# Altium PCB pcb.PcbDoc
Units mil, origin at the board's own origin, x right, y up, seen from the top; angles counter-clockwise.
Board outline 1525 x 925 mil, 2 copper layers (Top Layer, Bottom Layer); 21 components, 16 nets, 57 pads, 45 vias.
Unrouted connection lines stored in the file: 10.
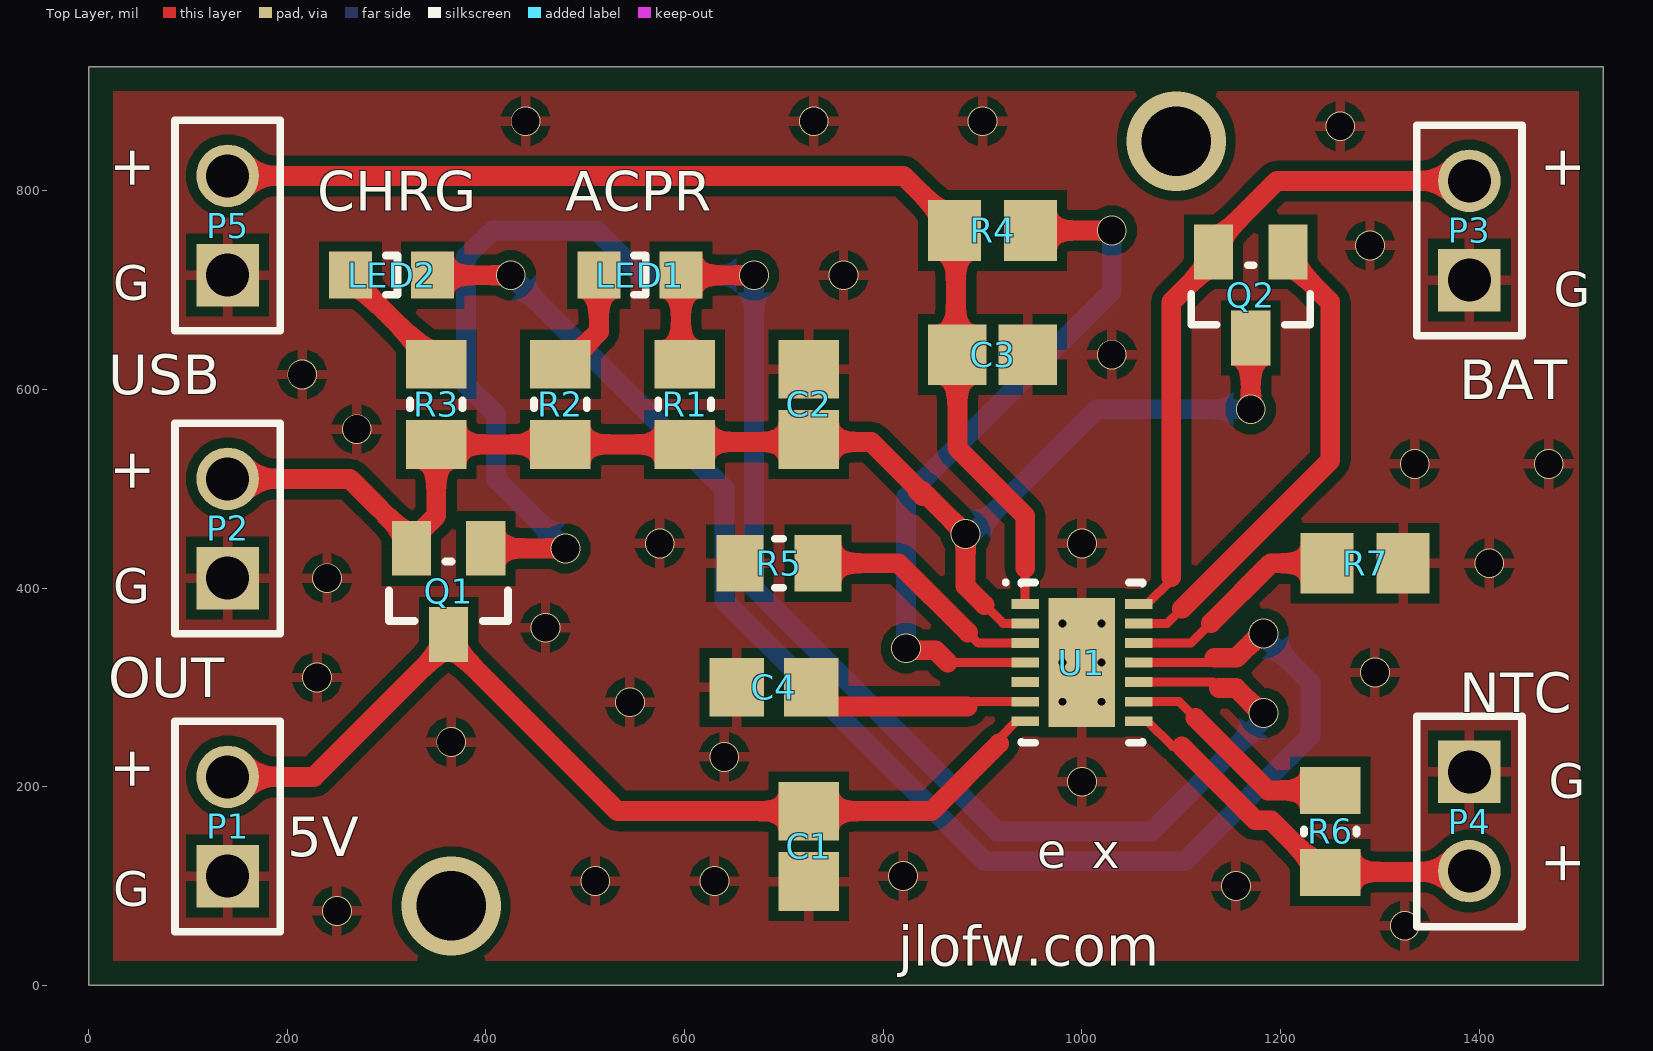
[diagram p0: Top Layer view]
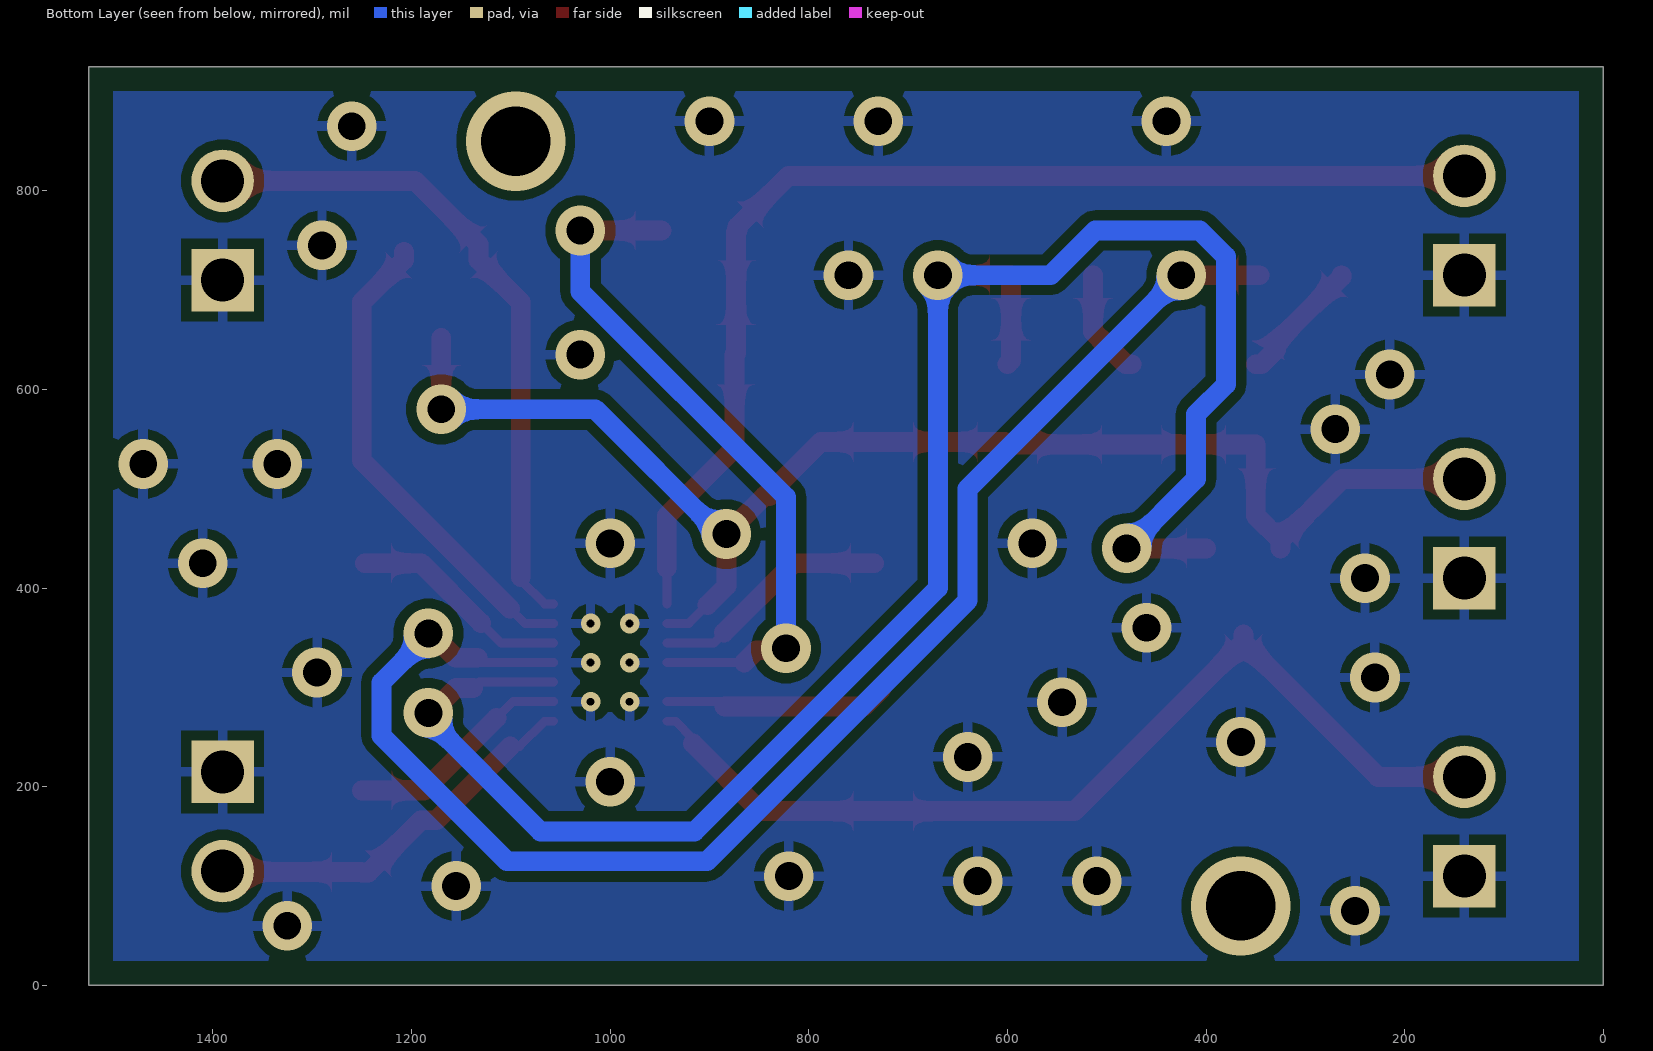
[diagram p1: Bottom Layer view, seen from below]

## Layer stack, top to bottom
Top Solder: solder mask 0.4, Solder Resist, Dk 3.5
Top Layer: signal copper 1.4
Dielectric 1: dielectric 12.6, FR-4, Dk 4.8
Bottom Layer: signal copper 1.4
Bottom Solder: solder mask 0.4, Solder Resist, Dk 3.5

## Board outline
0,0 1525,0 1525,925 0,925

## Design rules (kind name [scope] priority, off if disabled: settings)
Clearance [All] p1: gap=10 ignorepadtopadclearanceinfootprint=TRUE
PolygonConnect [All] p1: connectstyle=Relief reliefconductorwidth=10 reliefentries=4 polygonreliefangle="90 Angle" airgapwidth=10
RoutingVias [All] p1: holewidth=28 width=50 viastyle="Through Hole" minholewidth=28 minwidth=50 maxholewidth=28 maxwidth=50
SolderMaskExpansion [All] p1: expansion=4 istentingtop=FALSE
Width [All] p1: maxlimit=20 minlimit=9 preferedwidth=20
30 further rules are at their usual default settings.

## Components (designator, comment, footprint, x,y, rotation, side; value= is the part's Value field where it differs from the comment)
C1 "4.7uF" CAPC2013X145X50ML20T25 725,140 r90 top
C2 "4.7uF" CAPC2013X145X50ML20T25 725,585 r270 top
C3 "4.7uF" CAPC2013X145X50ML20T25 910,635 r180 top
C4 "0.1uF" CAPC2013X135X45ML10T25 690,300 r0 top
LED1 "Green" 0805_A 555,715 r180 top
LED2 "Red" 0805_A 305,715 r180 top
P1 "Output" 61300211121 140,160 r90 top
P2 "Output" 61300211121 140,460 r90 top
P3 "Battery" 61300211121 1390,760 r90 top
P4 "NTC" 61300211121 1390,165 r270 top
P5 "Output" 61300211121 140,765 r90 top
Q1 "FDN340P" FP-527AG-MFG 362.4,396.69 r270 top
Q2 "FDN340P" FP-527AG-MFG 1170,695 r270 top
R1 "1K" RESC2013X50X30ML20T20 600,585 r270 top
R2 "680" RESC2013X50X30ML20T20 475,585 r270 top
R3 "680" RESC2013X50X30ML20T20 350,585 r270 top
R4 "10K" RESC2013X70X40ML20T20 910,760 r180 top
R5 "2K" RESC2013X60X35ML10T20 695,425 r0 top
R6 "10K" RESC2012X145X30ML20T15 1250,155 r90 top
R7 "100K" RESC2013X70X40ML20T20 1285,425 r180 top
U1 "LTC4085EDE#TRPBF" LT-DE-14_V 1000,325 r0 top

## Footprints (in the part's own frame and the unit in brackets; to place one, negate y for a bottom-side part, rotate by r counter-clockwise, add the part's x,y. Pads: shape width x height; smd on the part's side, far side on the other; paste and mask are expansions set on the pad)
0805_A [mm] "Chip LED, 2-Leads, Body 2.0x1.3mm, IPC Medium Density"
  rect 1.1x1.2 smd: 1(-1.05,0) 2(1.05,0)
  silkscreen extent -0.15,-0.5 0.15,0.5, body extent -1,-0.62 1,0.63, height 0.68
61300211121 [mm] "Pin Header, pitch 2.54 mm, THT, Vertical, single row, 2p"
  rect 1.6x1.6 hole 1.1: 1(-1.27,0)
  round 1.6 hole 1.1: 2(1.27,0)
  silkscreen extent -2.69,-1.35 2.69,1.35, body extent -2.54,-1.27 2.54,1.27, height 8.57
CAPC2013X135X45ML10T25 [mm] "Chip Capacitor, 2-Leads, Body 2.10x1.35mm, IPC Low Density"
  rect 1.4x1.5 smd: 1(-0.95,0) 2(0.95,0)
  body extent -1.05,-0.67 1.05,0.67, height 1.35
CAPC2013X145X50ML20T25 [mm] "Chip Capacitor, 2-Leads, Body 2.00x1.25mm, IPC Low Density"
  rect 1.5x1.55 smd: 1(-0.9,0) 2(0.9,0)
  body extent -1.1,-0.72 1.1,0.72, height 1.45
FP-527AG-MFG [mm]
  rect 1.4x1 smd paste+0 mask+0: 1(-1.1,0.95) 2(-1.1,-0.95) 3(1.1,0)
  silkscreen extent -0.76,-1.52 0.76,1.52, body extent -1.9,-1.62 1.9,1.62, height 0.25
LT-DE-14_V [mm] "SON, 14-Leads, Body 4x3mm, Pitch 0.5mm, Thermal Pad 3.3x1.7mm"
  rect 0.7x0.25 smd: 1(-1.45,1.5) 2(-1.45,1) 3(-1.45,0.5) 4(-1.45,0) 5(-1.45,-0.5) 6(-1.45,-1) 7(-1.45,-1.5) 8(1.45,-1.5) 9(1.45,-1) 10(1.45,-0.5) 11(1.45,0) 12(1.45,0.5) 13(1.45,1) 14(1.45,1.5)
  rect 1.7x3.3 smd: 15(0,0)
  silkscreen extent -2,-2.05 1.55,2.1, body extent -1.5,-2 1.5,2, height 0.8
RESC2012X145X30ML20T15 [mm] "Chip Resistor, 2-Leads, Body 2.01x1.25mm, IPC Low Density"
  rect 1.2x1.55 smd: 1(-1.05,0) 2(1.05,0)
  silkscreen extent -0.05,-0.67 0.05,0.67, body extent -1.11,-0.72 1.1,0.72, height 1.45
RESC2013X50X30ML20T20 [mm] "Chip Resistor, 2-Leads, Body 2.00x1.25mm, IPC Low Density"
  rect 1.25x1.55 smd: 1(-1.025,0) 2(1.025,0)
  silkscreen extent -0.1,-0.67 0.1,0.67, body extent -1.1,-0.72 1.1,0.72, height 0.5
RESC2013X60X35ML10T20 [mm] "Chip Resistor, 2-Leads, Body 2.00x1.25mm, IPC Low Density"
  rect 1.2x1.45 smd: 1(-1,0) 2(1,0)
  silkscreen extent -0.1,-0.63 0.1,0.63, body extent -1.05,-0.67 1.05,0.67, height 0.6
RESC2013X70X40ML20T20 [mm] "Chip Resistor, 2-Leads, Body 2.00x1.25mm, IPC Low Density"
  rect 1.35x1.55 smd: 1(-0.975,0) 2(0.975,0)
  body extent -1.1,-0.72 1.1,0.72, height 0.7

## Part data
C1 C2 C3: library part CMP-2007-01010-1, Manufacturer=Kemet, Part Number=C0805C475K3PACTU
C4: library part CMP-2100-03644-1, "Chip Capacitor, 0.1 uF, +/- 10%, 50 V, -55 to 125 degC, 0805 (2012 Metric), RoHS, Tape and Reel", Capacitance=100nF, Case Code (Imperial)=0805, Case Code (Metric)=2012, Dielectric=X7R, Dielectric Material=Ceramic, Insulation Resistance=10GR, Manufacturer=Murata, Max Operating Temperature=125degC, Min Operating Temperature=-55degC, Package Description="2-Pin Surface Mount Device, Body 2 x 1.25 mm", Package Quantity=1, Tolerance=10%, Voltage=50V, Case/Package=0805, Datasheet URL=http://psearch.en.murata.com/capacitor/product/GRM21BR71H104KA01%23.pdf, Datasheet Version=42675.0, Depth=1.25mm, Height=1.25mm, Lead Free=LeadFree, Length=2mm, Manufacturer URL=http://www.murata.com/, Material=Ceramic, Mount=SurfaceMount, Number of Pins=2, Package Reference=0805, Packaging=TapeandReel, Radiation Hardening=No, REACH SVHC=Unknown, RoHSCompliant=true, Termination=SMD/SMT, Thickness=0.053inch, Voltage Rating=50V, Voltage Rating (DC)=50V, Width=0.049inch
LED1: library part CMP-1426-00007-1, "SMD mono-color Chip LED, WL-SMCW, Green", Manufacturer="Wuerth Elektronik", PartNumber=150080GS75000, Color=Green, ComponentLink1Description="Manufacturer URL", ComponentLink1URL=http://www.we-online.com, ComponentLink2Description=Datasheet, ComponentLink2URL=http://katalog.we-online.com/led/datasheet/150080GS75000.pdf, PackageReference=0805_A
LED2: library part CMP-1426-00011-1, "SMD mono-color Chip LED, WL-SMCW, Red", Manufacturer="Wuerth Elektronik", PartNumber=150080RS75000, Color=Red, ComponentLink1Description="Manufacturer URL", ComponentLink1URL=http://www.we-online.com, ComponentLink2Description=Datasheet, ComponentLink2URL=http://katalog.we-online.com/led/datasheet/150080RS75000.pdf, PackageReference=0805_A
P1 P2 P3 P4 P5: library part CMP-1712-00002-4, "THT Vertical Pin Header WR-PHD, Pitch 2.54 mm, Single Row, 2 pins", Contact Resistance=20mOhm, Manufacturer="Wurth Elektronik", Operating Temperature=-40to105degC, Package Reference=61300211121, Rated Current=3A, Withstanding Voltage=500VAC, Working Voltage=250VAC, Datasheet URL=https://katalog.we-online.de/em/datasheet/6130xx11121.pdf, Gender=Male, Manufacturer URL=http://www.we-online.de, Mounting Technology=THT, Orientation=Vertical, Packaging=Bag, Part Number=61300211121, Pin Number=2, Pitch=2.54mm, Publisher=WurthElektronik, Row Number=Single
Q1 Q2: library part CMP-2100-03638-2, "MOSFET P-CH 20V 2A SSOT3", Case/Package=SOT-23, Continuous Drain Current (ID)=2A, Current Rating=-2A, Drain to Source Breakdown Voltage=-20V, Drain to Source Resistance=60mR, Drain to Source Voltage (Vdss)=20V, Gate to Source Voltage (Vgs)=8V, Input Capacitance=779pF, Max Operating Temperature=150°C, Max Power Dissipation=500mW, Min Operating Temperature=-55°C, On-State Resistance=70MR, Package Quantity=1, Threshold Voltage=-800mV, Contact Plating=Tin, Dual Supply Voltage=-20V, Element Configuration=Single, Fall Time=11ns, Height=0.94mm, Lead Free="Lead Free", Length=2.92mm, Mount="Surface Mount", Nominal Vgs=-800mV, Number of Elements=1, Number of Pins=3, Packaging="Tape and Reel", Power Dissipation=500mW, Radiation Hardening=No, Rds On Max=70mR, REACH SVHC="No SVHC", Rise Time=9ns, Termination=SMD/SMT, Turn-Off Delay Time=27ns, Turn-On Delay Time=10ns, Voltage Rating (DC)=-20V, Weight=0.03g, Width=3.05mm
R1: library part CMP-1013-00510-2, Manufacturer="Vishay Dale", Part Number=CRCW08051K00FKEA
R2 R3: library part CMP-2001-04066-1, Manufacturer="Vishay Dale", Part Number=CRCW0805680RFKEA
R4: library part CMP-2001-00337-1, Manufacturer=Panasonic, Part Number=ERJ-6GEYJ103V
R5: library part CMP-2001-01361-1, Manufacturer=Yageo, Part Number=RC0805JR-072KL
R6: library part CMP-2001-04354-1, Manufacturer="Vishay Dale", Part Number=NTHS0805N02N1002JE
R7: library part CMP-2001-00338-1, Manufacturer=Panasonic, Part Number=ERJ-6GEYJ104V
U1: library part CMP-0478-00061-1, "USB Power Manager with Ideal Diode Controller and Li-Ion Charger with 4.2 V Float Voltage, 29% Vvntc, Undervoltage Current Limit, 4.35 to 5.5 V Vin, 14-pin SON (DE-14), -40 to 85 degC, Pb-Free, Tape and Reel", Manufacturer="Linear Technology", Code_JEDEC=MO-229, ComponentLink1Description="Manufacturer URL", ComponentLink1URL=http://www.linear.com/, ComponentLink2Description=Datasheet, ComponentLink2URL=http://cds.linear.com/docs/en/datasheet/4085fd.pdf, ComponentLink3Description="Package Specification", ComponentLink3URL=http://www.linear.com/docs/en/packaging/DFN_14_05-08-1708.pdf, DatasheetVersion="Rev. D", Mounting Technology="Surface Mount", Number of Cells=1, Number of Outputs=1, PackageDescription="14-Pin Plastic DFN, Body 4 x 3 mm, Pitch 0.5 mm", PackageReference=DE-14, PackageVersion="Rev. B, 06/2010", Packing="Tape and Reel", PartNumber=LTC4085EDE#TRPBF, RoHS=TRUE, Vin Max(V)=5.5, Vin Min(V)=4.35

## Via types
v1: diameter 30/50 (per signal layer), hole 28, Top Layer to Bottom Layer, 37 vias
v2: diameter 19.68, hole 7.87, Top Layer to Bottom Layer, 6 vias
v3: diameter 100, hole 70, Top Layer to Bottom Layer, 2 vias

## Nets (pads, with @x,y where several pads share a name; then routed paths per layer and width w, separated by ;. In a path a pad name is that pad's centre, name@x,y a point inside that pad or via, vN(x,y) a via of type N, cw(c..) or ccw(c..) an arc to the next point about the centre after c; other vN are vias at no path point)
5V_usb: C3.2 P5.2 R4.2 U1.1 | length 1162.2
  Top Layer w9: U1.1 942.91,420
  Top Layer w20: P5.2 820.55,815 871.61,763.94 R4.2 873.09,758.52 873.09,636.48 C3.2 874.57,540.92 942.91,472.57 942.91,420
5V_wall: C1.2 P1.2 Q1.3 U1.7 | length 977.8
  Top Layer w9: 916.56,243.44 916.56,248.44 934.06,265.94 U1.7
  Top Layer w20: P1.2 226.89,210 Q1.3@362.4,345.51 ; Q1.3 Q1.3@362.4,345.51 ; 916.56,243.44 848.54,175.43 C1.2 532.48,175.43 Q1.3@362.4,345.51
Battery: P3.2 Q2.2 U1.14 | length 682.4
  Top Layer w9: U1.14 1065.94,384.06 1090,408.11 1090,410.89
  Top Layer w20: 1090,410.89 1090,687.83 1132.6,730.43 1132.6,746.18 1196.42,810 P3.2
GND: C1.1 C2.1 C3.1 C4.1 P1.1 P2.1 P3.1 P4.1 P5.1 R5.1 R7.1
  other v1: 1325,60 250,75 1155,100 510,105 630,105 820,110 1000,205 640,230 365,245 545,285 230,310 1295,315 460,360 240,410 1410,425 575,445 1000,445 1335,525 1470,525 270,560 215,615 1030,635 760,715 1290,745 1260,865 440,870 730,870 900,870
LED_acpr: LED1.1 Q1.1 R1.1 U1.10 | length 2020.9
  Top Layer w9: U1.10 1131.97,305.31 1137.91,299.37
  Top Layer w20: Q1.1 v1(480,440) ; R1.1 596.34,629.02 LED1.1 v1(670,715) ; 1137.91,299.37 1155.21,299.37 1180.21,274.37 v1(1182.91,274.37)
  Bottom Layer w20: v1(480,440) 410,510 410,575 380,605 380,733.64 406.36,760 511.62,760 556.62,715 v1(670,715) 670,400 915,155 1070,155 1182.91,267.91 v1(1182.91,274.37)
LED_chrg: LED2.1 U1.11 | length 1506.8
  Top Layer w9: U1.11 1128.54,325 1133.41,329.87
  Top Layer w20: LED2.1 v1(425,715) ; 1133.41,329.87 1155.71,329.87 1180.21,354.37 v1(1182.91,354.37)
  Bottom Layer w20: v1(425,715) 640,500 640,387.57 902.57,125 1103.64,125 1230,251.36 1230,305 1182.91,352.09 v1(1182.91,354.37)
NetC4_2: C4.2 U1.6 | length 226.7
  Top Layer w9: 885,280.63 890,285.63 U1.6
  Top Layer w20: C4.2 727.4,298.19 744.96,280.63 885,280.63
NetLED1_2: LED1.2 R2.1 | length 109.1
  Top Layer w20: R2.1 480.91,625.35 513.66,658.11 LED1.2
NetLED2_2: LED2.2 R3.1 | length 128.9
  Top Layer w20: LED2.2 263.66,713.03 329.49,647.2 329.49,639.96 344.09,625.35 R3.1
NetQ2_1: Q2.1 U1.13 | length 488.4
  Top Layer w9: U1.13 1085.91,364.37 1100.77,379.23
  Top Layer w20: 1100.77,379.23 1250,528.46 1250,687.83 1207.4,730.43 Q2.1
NetR4_1: R4.1 U1.4 | length 714
  Top Layer w9: 865,325 U1.4
  Top Layer w20: v1(822.91,339.37) 824.83,337.46 852.54,337.46 865,325 ; R4.1 v1(1030,760)
  Bottom Layer w20: v1(822.91,339.37) 822.91,491.55 1030,698.64 v1(1030,760)
NetR5_2: R5.2 U1.3 | length 241.8
  Top Layer w9: 885.17,355.17 895.65,344.68 U1.3
  Top Layer w20: R5.2 815.34,425 885.17,355.17
NetR6_2: R6.2 U1.9 | length 229.9
  Top Layer w9: U1.9 1097.9,285.63 1114.26,269.26
  Top Layer w20: 1114.26,269.26 1187.19,196.34 R6.2
NetR7_2: R7.2 U1.12 | length 222.8
  Top Layer w9: U1.12 1109.72,344.68 1130.02,364.98
  Top Layer w20: 1130.02,364.98 1190.04,425 R7.2
NTC: P4.2 R6.1 U1.8 | length 396.5
  Top Layer w9: U1.8 1065.94,265.94 1091.34,240.55 1100.55,240.55
  Top Layer w20: 1100.55,240.55 1174.76,166.34 1190.43,166.34 1243.11,113.66 R6.1 1250.67,114.33 1389.33,114.33 P4.2
Output: C2.2 P2.2 Q1.2 Q2.3 R1.2 R2.2 R3.2 U1.2 | length 1441.3
  Top Layer w9: 901.98,383.07 920.68,364.37 U1.2
  Top Layer w20: P2.2 262.87,510 Q1.2@325,447.87 ; Q1.2 Q1.2@325,447.87 ; 901.98,383.07 882.91,402.13 v1(882.91,454.37) 844.45,492.84 839.45,492.84 839.45,497.84 834.45,497.84 834.45,500.55 787.89,547.11 602.46,547.11 R1.2 R2.2 R3.2 350,472.87 Q1.2@325,447.87 ; v1(1170,580) Q2.3
  Bottom Layer w20: v1(882.91,454.37) 889.37,454.37 1015,580 v1(1170,580)
pads on no net: U1.5 U1.15
copper on no net:
  other v2: 980.32,285.63 1019.69,285.63 980.32,325 1019.69,325 980.32,364.37 1019.69,364.37
  other v3: 365,80 1095,850

## Polygon pours and split planes (outlines as drawn)
GND on Top Layer "GND_POUR_TOP" (solid, pour order 0): 25,900 1500,900 1500,25 25,25
GND on Bottom Layer "GND_POUR_BOT" (solid, pour order 2): 1500,25 1500,900 25,900 25,25

## Silkscreen, mask and mechanical layers (free items; w line width, h text height)
Top Overlay:
  text "+" at 61.66,800 h40 r90
  text "+" at 1501.66,800 h40 r90
  text "CHRG" at 230,780 h40
  text "ACPR" at 480,780 h40
  text "G" at 25,678.32 h60
  text "G" at 1475,671.6 h60
  text "USB" at 20,595 h40
  text "BAT" at 1380,590 h40
  text "+" at 61.66,495 h40 r90
  text "G" at 25,373.33 h60
  text "OUT" at 20,290 h40
  text "NTC" at 1380,275 h40
  text "+" at 61.66,195 h40 r90
  text "G" at 1470,176.6 h60
  text "5V" at 200,130 h40
  text "e" at 955,106.6 h60
  text "x" at 1010,106.6 h60
  text "+" at 1501.66,100 h40 r90
  text "G" at 25,68.33 h60
  text "jlofw.com" at 815,20 h40
Mechanical 1:
  the board outline again, w1